# Altium PCB Definitive_Robo_Hand_main.PcbDoc
Units mm, origin at the board's own origin, x right, y up, seen from the top; angles counter-clockwise.
Board outline 99.06 x 96.6 mm, 2 copper layers (Top Layer, Bottom Layer); 21 components, 25 nets, 97 pads, 0 vias.
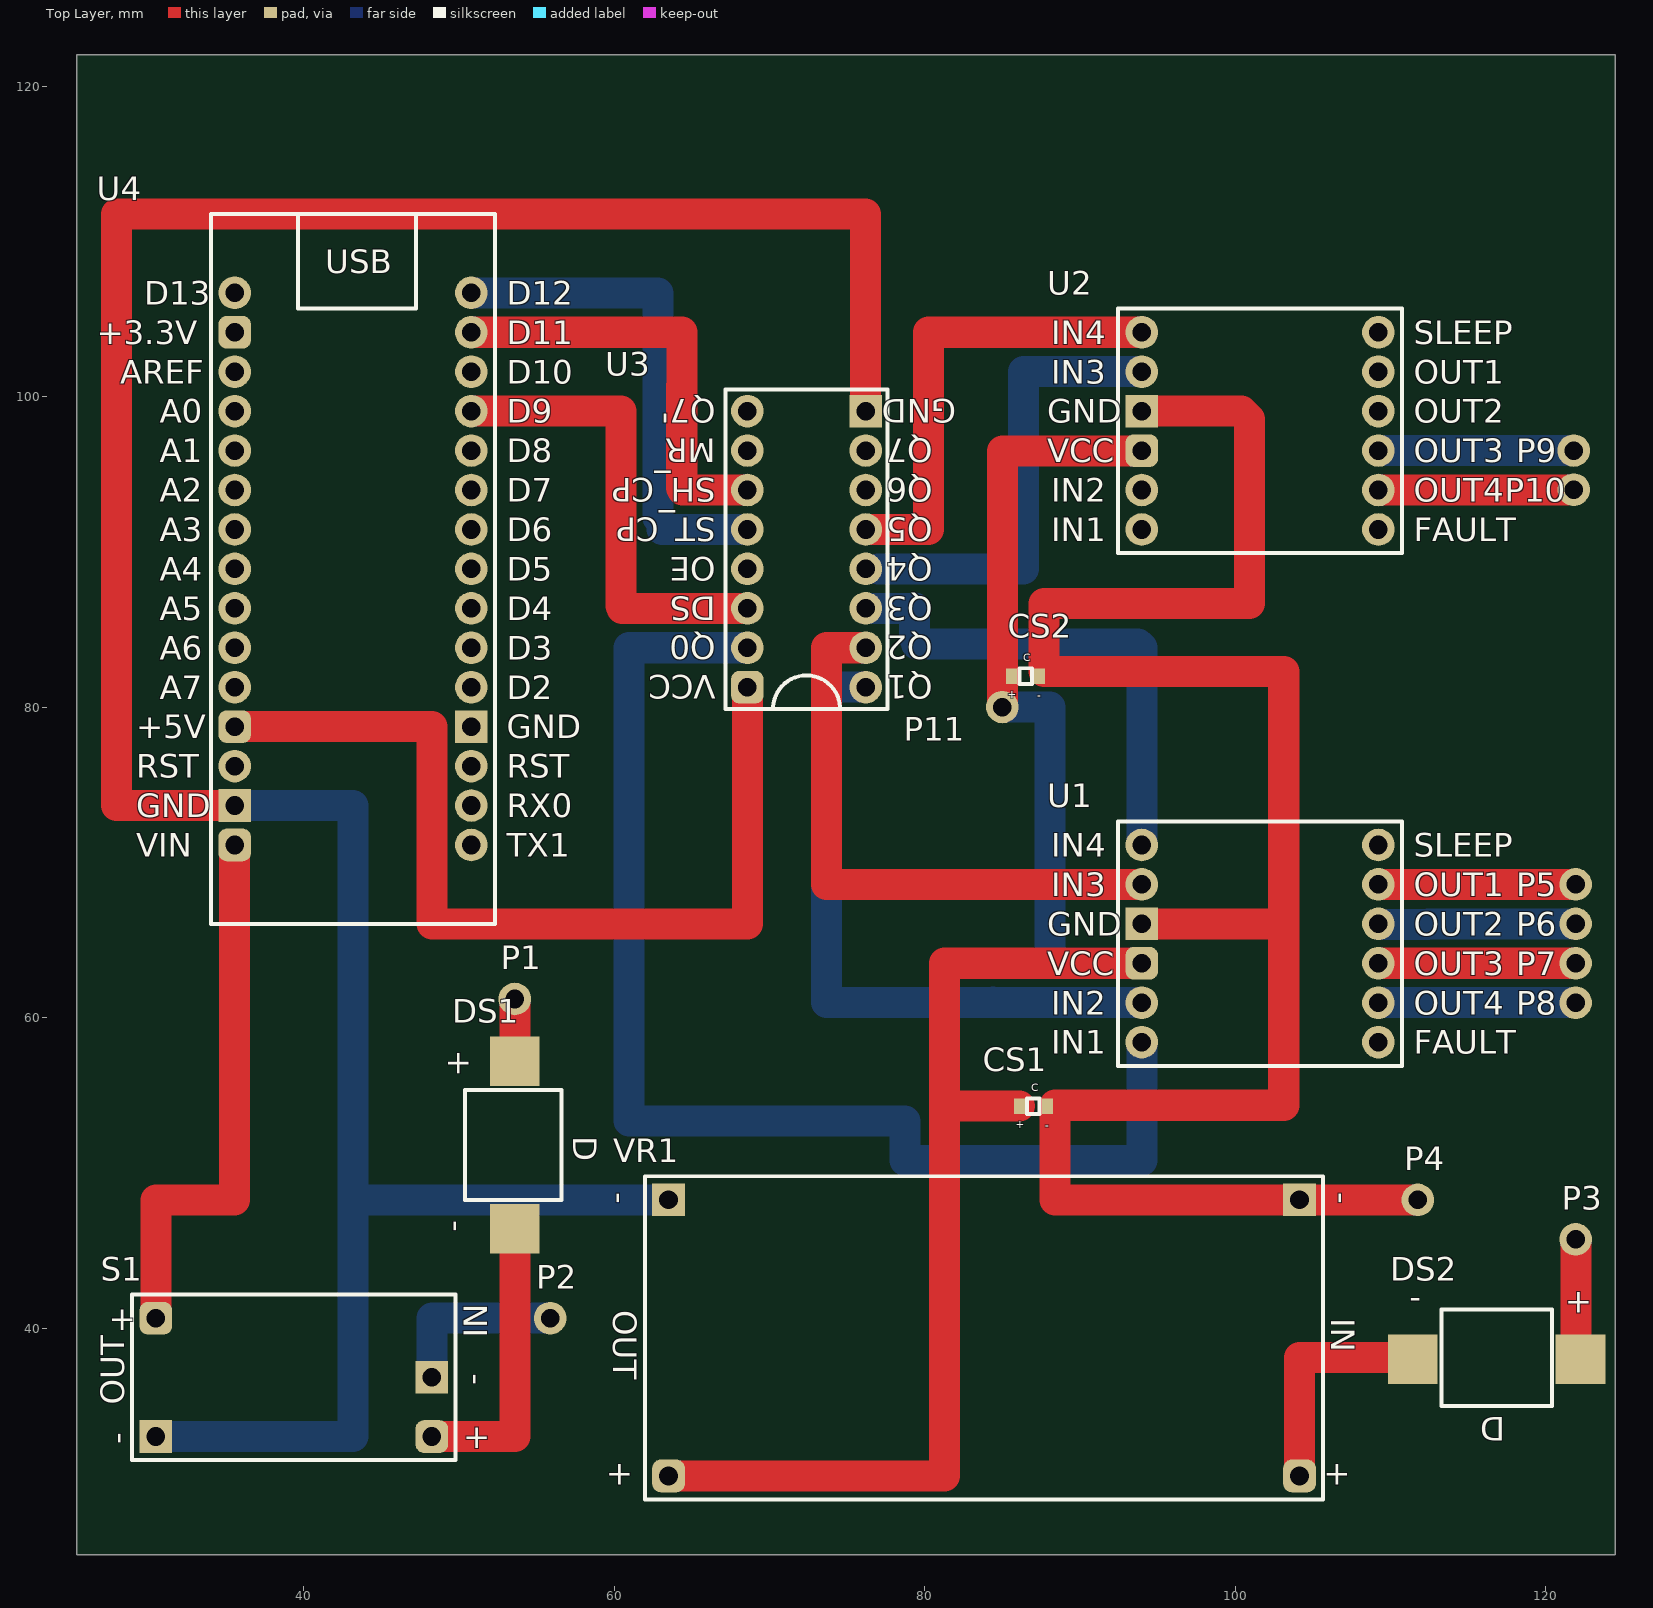
[diagram p0: Top Layer view]
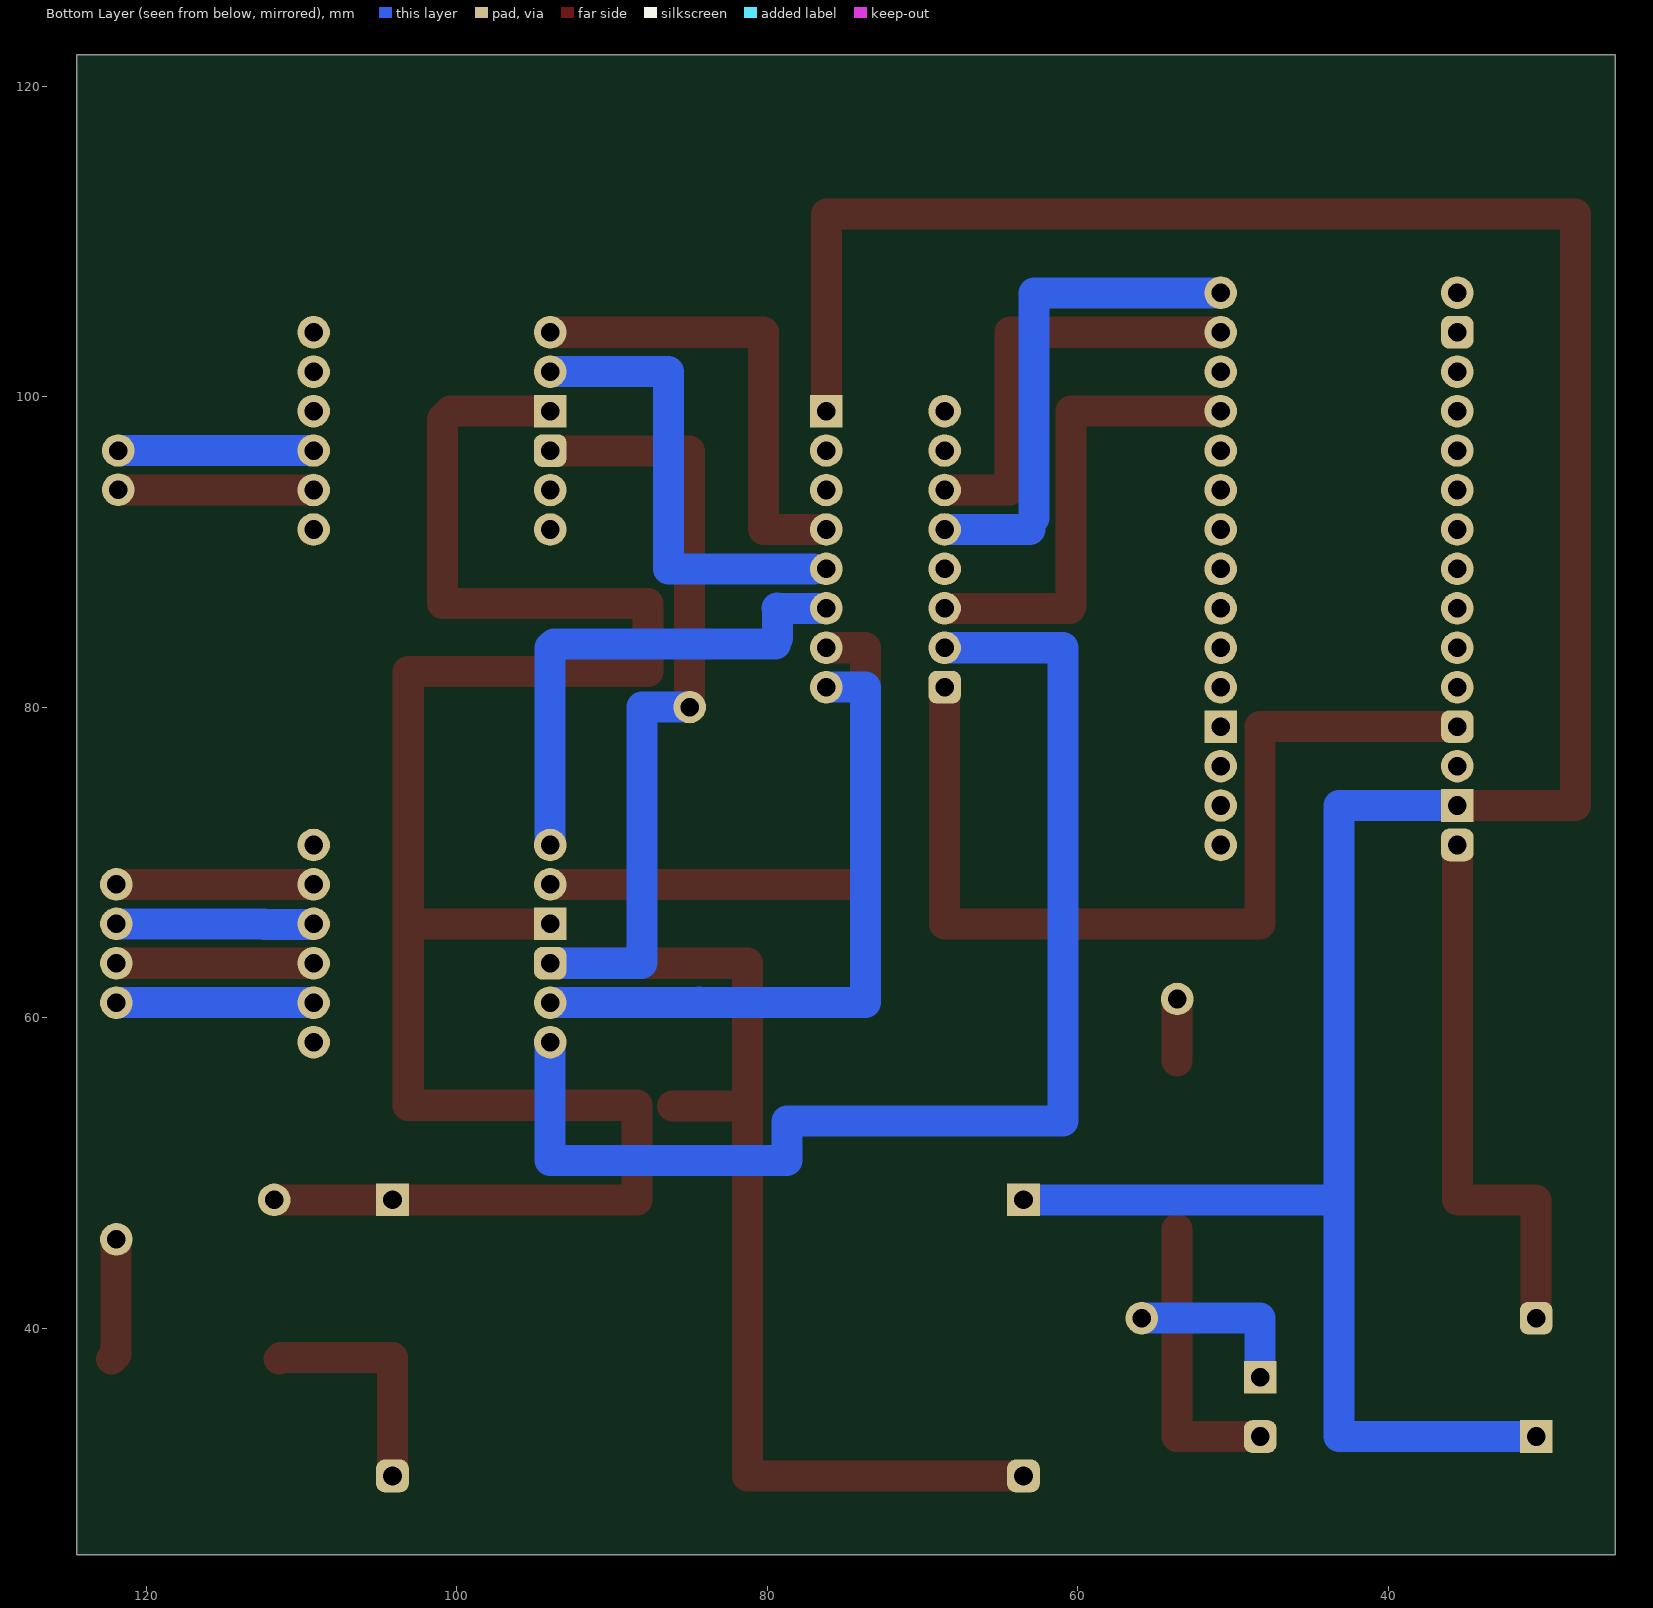
[diagram p1: Bottom Layer view, seen from below]

## Layer stack, top to bottom
Top Solder: solder mask 0.0102, Solder Resist, Dk 3.5
Top Layer: signal copper 0.0356
Dielectric 1: dielectric 0.32, FR-4, Dk 4.8
Bottom Layer: signal copper 0.0356
Bottom Solder: solder mask 0.0102, Solder Resist, Dk 3.5

## Board outline
25.4,25.4 124.46,25.4 124.46,122 25.4,122

## Design rules (kind name [scope] priority, off if disabled: settings)
AssemblyTestPointUsage [All] p1: isadvanced=TRUE
AssemblyTestpoint [All] p1: isadvanced=TRUE testpointundercomponent=TRUE minsize=1.016 maxsize=2.54 preferedsize=1.524 minholesize=0 maxholesize=1.016 preferedholesize=0.813 testpointgrid=0.025 usegrid=TRUE gridtolerance=0 allowsidetop=TRUE allowsidebottom=TRUE
Clearance Clearance_1 [OnMid vs OnMid] p1: gap=0.1 ignorepadtopadclearanceinfootprint=FALSE sourcerule=36 cellrowname=All cellrowtype=0 cellcolname=All cellcoltype=0 innerlayers=TRUE
Clearance Clearance_2 [(ExistsOnLayer('Top Layer') Or ExistsOnLayer('Bottom Layer')) vs (ExistsOnLayer('Top Layer') Or ExistsOnLayer('Bottom Layer'))] p2: gap=0.1 ignorepadtopadclearanceinfootprint=FALSE sourcerule=36 cellrowname=All cellrowtype=0 cellcolname=All cellcoltype=0 outerlayers=TRUE
Clearance [All] p3: gap=0.254 ignorepadtopadclearanceinfootprint=FALSE ismatrix=TRUE
ComponentClearance [All] p1: isadvanced=TRUE gap=0.254 collisioncheckmode=3 verticalgap=0.254 showdistances=FALSE
DiffPairsRouting [All] p1: maxlimit=0.2 minlimit=0.2 mostfreqgap=0.2 toplayer_minwidth=0.381 toplayer_maxwidth=0.381 toplayer_prefwidth=0.381 bottomlayer_minwidth=0.381 bottomlayer_maxwidth=0.381 bottomlayer_prefwidth=0.381 maxuncoupledlength=12.7
FabricationTestPointUsage [All] p1: isadvanced=TRUE valid=0 allowmultiple=FALSE
FabricationTestpoint [All] p1: isadvanced=TRUE side=3 testpointundercomponent=TRUE minsize=1.016 maxsize=2.54 preferedsize=1.524 minholesize=0 maxholesize=1.016 preferedholesize=0.813 testpointgrid=0.025 allowsidetop=TRUE allowsidebottom=TRUE usegrid=TRUE gridtolerance=0
FanoutControl Fanout_BGA [IsBGA] p1: isadvanced=TRUE bgadir=Out bgaviamode=Centered fanoutstyle=Auto fanoutdirection=Alternating viagrid=0.025 // Fanout_BGA (Default Rule)
FanoutControl Fanout_LCC [IsLCC] p2: isadvanced=TRUE bgadir=Out bgaviamode=Centered fanoutstyle=Auto fanoutdirection=Alternating viagrid=0.025 // Fanout_LCC (Default Rule)
FanoutControl Fanout_SOIC [IsSOIC] p3: isadvanced=TRUE bgadir=Out bgaviamode=Centered fanoutstyle=Auto fanoutdirection=Alternating viagrid=0.025 // Fanout_SOIC (Default Rule)
FanoutControl Fanout_Small [(CompPinCount < 5)] p4: isadvanced=TRUE bgadir=Out bgaviamode=Centered fanoutstyle=Auto fanoutdirection=OutThenIn viagrid=0.025 // Fanout_Small (Default Rule)
FanoutControl Fanout_Default [All] p5: isadvanced=TRUE bgadir=Out bgaviamode=Centered fanoutstyle=Auto fanoutdirection=Alternating viagrid=0.025 // Fanout_Default (Default Rule)
Height [All] p1: isadvanced=TRUE minheight=0 maxheight=25.4 prefheight=12.7
HoleSize [All] p1: isadvanced=TRUE absolutevalues=TRUE maxlimit=2.54 minlimit=0.025 maxpercent=80.000 minpercent=20.000
HoleToHoleClearance [All] p1: isadvanced=TRUE gap=0.254 allowstackedmicrovias=TRUE
LayerPairs [All] p1: isadvanced=TRUE enforce=TRUE
MinimumSolderMaskSliver [All] p1: isadvanced=TRUE minsoldermaskwidth=0.254
NetAntennae [All] p1: isadvanced=TRUE netantennaetolerance=0
PasteMaskExpansion [All] p1: isadvanced=TRUE expansion=0
PlaneClearance [All] p1: isadvanced=TRUE clearance=0.508
PlaneConnect [All] p1: isadvanced=TRUE planeconnectstyle=Relief reliefexpansion=0.508 reliefentries=4 reliefconductorwidth=0.254 reliefairgap=0.254
PolygonConnect [All] p1: connectstyle=Relief reliefconductorwidth=0.254 reliefentries=4 polygonreliefangle="90 Angle" airgapwidth=0.254
RoutingCorners [All] p1: isadvanced=TRUE cornerstyle=45-Degree minsetback=2.54 maxsetback=2.54
RoutingPriority [All] p1: isadvanced=TRUE routingpriority=0
RoutingVias [All] p1: holewidth=0.711 width=1.27 viastyle="Through Hole" minholewidth=0.711 minwidth=1.27 maxholewidth=0.711 maxwidth=1.27
ShortCircuit [All] p1: isadvanced=TRUE allowed=FALSE
SilkToSilkClearance [All] p1: isadvanced=TRUE silktosilkclearance=0.254
SilkToSolderMaskClearance [IsPad] p1: isadvanced=TRUE minsilkscreentomaskgap=0.254 clearancetoexposedcopper=TRUE
SolderMaskExpansion [All] p1: isadvanced=TRUE expansion=0.102 istentingtop=FALSE
UnRoutedNet [All] p1: isadvanced=TRUE
UnpouredPolygon [All] p1: isadvanced=TRUE
Width [All] p1: maxlimit=2 minlimit=2 preferedwidth=2 minimp=50.000000 maximp=50.000000 favimp=50.000000
3 further rules are at their usual default settings.

## Components (designator, comment, footprint, x,y, rotation, side; value= is the part's Value field where it differs from the comment)
CS1 "CapacitorSMD" CapacitorSMD 87,54.3 r0 top
CS2 "CapacitorSMD" CapacitorSMD 86.5,82 r0 top
DS1 "DiodeSS32SMD" DiodeSS32SMD 53.5,51.8 r270 top
DS2 "DiodeSS32SMD" DiodeSS32SMD 116.84,38.1 r180 top
P1 "Pin" P#1 53.6,61.2 r0 top
P2 "Pin" P#1 55.88,40.64 r0 top
P3 "Pin" P#1 121.92,45.72 r0 top
P4 "Pin" P#1 111.76,48.26 r0 top
P5 "Pin" P#1 121.92,68.58 r0 top
P6 "Pin" P#1 121.92,66.04 r0 top
P7 "Pin" P#1 121.92,63.5 r0 top
P8 "Pin" P#1 121.92,60.96 r0 top
P9 "Pin" P#2 121.92,96.52 r0 top
P10 "Pin" P#1 121.8,94 r0 top
P11 "Pin" P#1 85,80 r0 top
S1 "SX1308" "DC-DC Step-Up Footprint" 27.94,30.48 r0 top
U1 "DRV8833" PCB_DRV8833 91.44,55.88 r0 top
U2 "DRV8833" PCB_DRV8833 91.44,88.9 r0 top
U3 "74HC595" PCB_74HC595_Footprint 78.74,101.6 r180 top
U4 "DRV8833" PCB_ATMega328p 33.02,68.58 r0 top
VR1 "LM2596" "DC-DC Step-Down Footprint" 106.68,50.8 r180 top

## Footprints (in the part's own frame and the unit in brackets; to place one, negate y for a bottom-side part, rotate by r counter-clockwise, add the part's x,y. Pads: shape width x height; smd on the part's side, far side on the other; paste and mask are expansions set on the pad)
CapacitorSMD [mm]
  rect 0.7x1 smd: 0(-0.9,0) 1(0.9,0)
  silkscreen extent -0.4,-0.5 0.4,0.5
"DC-DC Step-Down Footprint" [mm]
  rrect50% 2.1x2.1 hole 1.2: 0(2.54,20.32) 2(43.18,20.32)
  rect 2.1x2.1 hole 1.2: 1(2.54,2.54) 3(43.18,2.54)
  silkscreen extent 1.02,1.02 44.7,21.84
"DC-DC Step-Up Footprint" [mm]
  rrect50% 2.1x2.1 hole 1.2: 0(2.54,10.16) 3(20.32,2.54)
  rect 2.1x2.1 hole 1.2: 1(2.54,2.54) 2(20.32,6.35)
  silkscreen extent 1.02,1.02 21.84,11.68
DiodeSS32SMD [mm]
  rect 3.2x3.2 smd: 0(-5.4,0.1) 1(5.4,0.1)
  silkscreen extent -3.55,-3.1 3.55,3.1
P#1 [mm]
  round 2.1 hole 1.2: 0(0,0)
P#2 [mm]
  round 2.1 hole 1.2: 0(-0.12,0)
PCB_74HC595_Footprint [mm]
  rect 2.1x2.1 hole 1.2: 0(2.54,2.54)
  round 2.1 hole 1.2: 1(2.54,5.08) 2(2.54,7.62) 3(2.54,10.16) 4(2.54,12.7) 5(2.54,15.24) 6(2.54,17.78) 7(2.54,20.32) 9(10.16,17.78) 10(10.16,15.24) 11(10.16,12.7) 12(10.16,10.16) 13(10.16,7.62) 14(10.16,5.08) 15(10.16,2.54)
  rrect50% 2.1x2.1 hole 1.2: 8(10.16,20.32)
  silkscreen extent 1.14,1.14 11.56,21.72
PCB_ATMega328p [mm]
  rrect50% 2.1x2.1 hole 1.2: 0(2.54,2.54) 3(2.54,10.16) 13(2.54,35.56)
  rect 2.1x2.1 hole 1.2: 1(2.54,5.08) 26(17.78,10.16)
  round 2.1 hole 1.2: 2(2.54,7.62) 4(2.54,12.7) 5(2.54,15.24) 6(2.54,17.78) 7(2.54,20.32) 8(2.54,22.86) 9(2.54,25.4) 10(2.54,27.94) 11(2.54,30.48) 12(2.54,33.02) 14(2.54,38.1) 15(17.78,38.1) 16(17.78,35.56) 17(17.78,33.02) 18(17.78,30.48) 19(17.78,27.94) 20(17.78,25.4) 21(17.78,22.86) 22(17.78,20.32) 23(17.78,17.78) 24(17.78,15.24) 25(17.78,12.7) 27(17.78,7.62) 28(17.78,5.08) 29(17.78,2.54)
  silkscreen extent 1.02,-2.54 19.3,43.18
PCB_DRV8833 [mm]
  round 2.1 hole 1.2: 0(2.54,2.54) 1(2.54,5.08) 4(2.54,12.7) 5(2.54,15.24) 6(17.78,15.24) 7(17.78,12.7) 8(17.78,10.16) 9(17.78,7.62) 10(17.78,5.08) 11(17.78,2.54)
  rrect50% 2.1x2.1 hole 1.2: 2(2.54,7.62)
  rect 2.1x2.1 hole 1.2: 3(2.54,10.16)
  silkscreen extent 1.02,1.02 19.3,16.76

## Part data
S1: "Модуль mini DC-DC Step-Up Converter 2.5...10V to 5V / 8V / 9V / 12V - это миниатюрный повышающий преобразователь постоянного тока на микросхеме импульсного преобразователя SX1308.  /  /  Выходное напряжение на преобразователе имеет четыре фиксированных настройки - 5В, 8В, 9В или 12В, одно из этих напряжений выбирается запайкой соответствующей комбинации перемычек A и B (по табличке на обратной стороне платы). /  /  Максимальный выходной ток зависит от установленного выходного напряжения, при 5В он равен 1А, при 8В - 0.5А, 9В - 0,45А, 12В - 0.3А. Частота преобразования - 1.2 МГц. /  /  На плате (со стороны Vout) светодиод - индикатор питания. По умолчанию он выключен. Для включения этого светодиода также нужно запаять соседнюю перемычку."
U1 U2: library part "Motor Driver", "Драйвер крокового/колекторних двигунів DRV8833"
U3: library part SCS-16, "SN74HC595N - вихідний зсувний регістр 74HC595"
U4: library part "Arduino Nano", "DCCduino Nano CH340 - аналог Arduino Nano v3.0 TYPE C"
VR1: library part "DC-DC Step-Down", "DC-DC конвертер знижуючий 4.5...40В на 1.5...35В на LM2596"

## Nets (pads, with @x,y where several pads share a name; then routed paths per layer and width w, separated by ;. In a path a pad name is that pad's centre, name@x,y a point inside that pad or via, vN(x,y) a via of type N, cw(c..) or ccw(c..) an arc to the next point about the centre after c; other vN are vias at no path point)
NetCS1_0: CS1.0 CS2.0 P11.0 U1.2 U2.2 VR1.2 | length 119.5
  Top Layer w2: VR1.2 81.28,30.48 81.28,54.5 ; P11.0 85,96.5 93.96,96.5 U2.2 ; CS1.0 81.28,54.3 81.28,54.5 ; U1.2 81.28,63.5 81.28,54.5
  Bottom Layer w2: P11.0 85.019,80.019 88.069,80.019 88.069,63.531 88.1,63.5 U1.2
NetCS1_1: CS1.1 CS2.1 P4.0 U1.3 U2.3 VR1.1 | length 133.3
  Top Layer w2: U1.3 103.124,66.04 ; U2.3 100.396,99.06 100.904,98.552 100.904,86.68 87.696,86.68 87.696,82.296 103.124,82.296 103.124,66.04 ; P4.0 VR1.1 88.392,48.26 88.392,54.356 103.124,54.356 103.124,66.04
NetDS1_0: DS1.0 P1.0 | length 4
  Top Layer w2: DS1.0 P1.0
NetDS1_1: DS1.1 S1.3 | length 18.7
  Top Layer w2: S1.3 53.6,33.02 DS1.1
NetDS2_0: DS2.0 P3.0 | length 7.9
  Top Layer w2: P3.0 121.939,45.701 121.939,38.301 DS2.0
NetDS2_1: DS2.1 VR1.0 | length 15
  Top Layer w2: VR1.0 104.14,38.1 111.34,38.1 DS2.1
NetP2_0: P2.0 S1.2 | length 11.4
  Bottom Layer w2: S1.2 48.26,40.64 P2.0
NetP5_0: P5.0 U1.7 | length 12.7
  Top Layer w2: U1.7 P5.0
NetP6_0: P6.0 U1.8 | length 12.7
  Bottom Layer w2: U1.8 109.26,66 112.368,66 112.408,66.04 118.732,66.04 P6.0
NetP7_0: P7.0 U1.9 | length 12.7
  Top Layer w2: U1.9 P7.0
NetP8_0: P8.0 U1.10 | length 12.7
  Bottom Layer w2: U1.10 P8.0
NetP9_0: P9.0 U2.9 | length 12.4
  Bottom Layer w2: U2.9 P9.0@121.58,96.52
NetP10_0: P10.0 U2.10 | length 12.2
  Top Layer w2: U2.10 P10.0@121.38,93.98
NetS1_0: S1.0 U4.0 | length 35.6
  Top Layer w2: S1.0 30.48,48.26 35.56,48.26 U4.0
NetS1_1: S1.1 U3.0 U4.1 VR1.3 | length 187.5
  Top Layer w2: U4.1@35,73.66 27.94,73.66 27.94,111.76 76.2,111.76 U3.0
  Bottom Layer w2: S1.1 43.18,33.02 43.18,48.5 ; U4.1 43.18,73.66 43.18,48.5 ; VR1.3 43.42,48.26 43.18,48.5
NetU1_0: U1.0 U3.9 | length 81.3
  Bottom Layer w2: U3.9 60.96,83.82 60.96,53.34 78.74,53.34 78.74,50.8 93.98,50.8 U1.0
NetU1_1: U1.1 U3.7 | length 43.3
  Bottom Layer w2: U3.7 73.66,81.28 73.66,60.96 U1.1@94,60.96 ; 84.36,60.96 84.4,61
NetU1_4: U1.4 U3.6 | length 38.1
  Top Layer w2: U3.6 73.66,83.82 73.66,68.58 U1.4
NetU1_5: U1.5 U3.5 | length 32.4
  Bottom Layer w2: U3.5 79.351,86.36 ; 79.351,84.431 79.351,86.36 ; 79.388,86.36 79.369,86.378 79.351,86.36 ; 79.48,84.05 93.75,84.05 93.98,83.82 U1.5
NetU2_4: U2.4 U3.4 | length 29.7
  Bottom Layer w2: U3.4@77,88.9 86.36,88.9 86.36,101.6 U2.4
NetU2_5: U2.5 U3.3 | length 30
  Top Layer w2: U3.3@76.25,91.44 U3.3 80,91.44 ; 80.25,91.44 80.25,101.353 ; 80.25,101.403 80.25,104.14 ; 80.5,104.14 U2.5
NetU3_8: U3.8 U4.3 | length 61
  Top Layer w2: U4.3 48.26,78.74 48.26,66.04 68.58,66.04 U3.8
NetU3_10: U3.10 U4.18 | length 30.3
  Top Layer w2: U4.18 60.44,99.06 60.44,86.5 ; 60.5,86.36 U3.10
NetU3_12: U3.12 U4.15 | length 32
  Bottom Layer w2: U4.15 62.82,106.68 62.82,92.18 ; 63.08,91.44 U3.12
NetU3_13: U3.13 U4.16 | length 27.7
  Top Layer w2: U4.16 64.36,104.14 64.36,100.797 ; 64.35,94.1 64.35,100.717 ; 64.4,93.98 U3.13
pads on no net: U1.6 U1.11 U2.0 U2.1 U2.6 U2.7 U2.8 U2.11 U3.1 U3.2 U3.11 U3.14 U3.15 U4.2 U4.4 U4.5 U4.6 U4.7 U4.8 U4.9 U4.10 U4.11 U4.12 U4.13 U4.14 U4.17 U4.19 U4.20 U4.21 U4.22 U4.23 U4.24 U4.25 U4.26 U4.27 U4.28 U4.29

## Text inside footprints (layer, text, board x,y; h text height)
CS1: Top Overlay "C" at 86.854,55.254 h0.5; Top Overlay "-" at 87.754,52.804 h0.5; Top Overlay "+" at 85.854,52.871 h0.5
CS2: Top Overlay "+" at 85.354,80.571 h0.5; Top Overlay "-" at 87.254,80.504 h0.5; Top Overlay "C" at 86.354,82.954 h0.5
DS1: Top Overlay "D" at 57.354,52.346 h1.52 r270; Top Overlay "+" at 49.3,57.946 h1.52 r270; Top Overlay "-" at 49.192,46.946 h1.52 r270
DS2: Top Overlay "-" at 111.986,42.408 h1.52 r180; Top Overlay "+" at 122.986,42.3 h1.52 r180; Top Overlay "D" at 117.386,34.246 h1.52 r180
S1: Top Overlay "OUT" at 28.448,35.052 h1.52 r90; Top Overlay "+" at 27.432,39.878 h1.52; Top Overlay "-" at 28.702,32.512 h1.52 r90; Top Overlay "IN" at 51.816,39.37 h1.52 r90; Top Overlay "-" at 51.562,36.322 h1.52 r90; Top Overlay "+" at 50.292,32.258 h1.52
U1: Top Overlay "IN1" at 88.138,57.658 h1.52; Top Overlay "IN2" at 88.138,60.198 h1.52; Top Overlay "VCC" at 87.884,62.738 h1.52; Top Overlay "GND" at 87.884,65.278 h1.52; Top Overlay "IN3" at 88.138,67.818 h1.52; Top Overlay "IN4" at 88.138,70.358 h1.52; Top Overlay "SLEEP" at 111.506,70.358 h1.52; Top Overlay "OUT1" at 111.506,67.818 h1.52; Top Overlay "OUT2" at 111.506,65.278 h1.52; Top Overlay "OUT3" at 111.506,62.738 h1.52; Top Overlay "OUT4" at 111.506,60.198 h1.52; Top Overlay "FAULT" at 111.506,57.658 h1.52
U2: Top Overlay "FAULT" at 111.506,90.678 h1.52; Top Overlay "OUT4" at 111.506,93.218 h1.52; Top Overlay "OUT3" at 111.506,95.758 h1.52; Top Overlay "OUT2" at 111.506,98.298 h1.52; Top Overlay "OUT1" at 111.506,100.838 h1.52; Top Overlay "SLEEP" at 111.506,103.378 h1.52; Top Overlay "IN4" at 88.138,103.378 h1.52; Top Overlay "IN3" at 88.138,100.838 h1.52; Top Overlay "GND" at 87.884,98.298 h1.52; Top Overlay "VCC" at 87.884,95.758 h1.52; Top Overlay "IN2" at 88.138,93.218 h1.52; Top Overlay "IN1" at 88.138,90.678 h1.52
U3: Top Overlay "Q7'" at 66.548,99.822 h1.52 r180; Top Overlay "MR" at 66.548,97.282 h1.52 r180; Top Overlay "SH_CP" at 66.548,94.742 h1.52 r180; Top Overlay "ST_CP" at 66.548,92.202 h1.52 r180; Top Overlay "OE" at 66.548,89.662 h1.52 r180; Top Overlay "DS" at 66.548,87.122 h1.52 r180; Top Overlay "Q0" at 66.548,84.582 h1.52 r180; Top Overlay "VCC" at 66.548,82.042 h1.52 r180; Top Overlay "GND" at 82.042,99.822 h1.52 r180; Top Overlay "Q7" at 80.518,97.282 h1.52 r180; Top Overlay "Q6" at 80.518,94.742 h1.52 r180; Top Overlay "Q5" at 80.518,92.202 h1.52 r180; Top Overlay "Q4" at 80.518,89.662 h1.52 r180; Top Overlay "Q3" at 80.518,87.122 h1.52 r180; Top Overlay "Q2" at 80.518,84.582 h1.52 r180; Top Overlay "Q1" at 80.518,82.042 h1.52 r180
U4: Top Overlay "D13" at 29.718,105.918 h1.52; Top Overlay "+3.3V" at 26.67,103.378 h1.52; Top Overlay "AREF" at 28.194,100.838 h1.52; Top Overlay "A0" at 30.734,98.298 h1.52; Top Overlay "A1" at 30.734,95.758 h1.52; Top Overlay "A2" at 30.734,93.218 h1.52; Top Overlay "A3" at 30.734,90.678 h1.52; Top Overlay "A4" at 30.734,88.138 h1.52; Top Overlay "A5" at 30.734,85.598 h1.52; Top Overlay "A6" at 30.734,83.058 h1.52; Top Overlay "A7" at 30.734,80.518 h1.52; Top Overlay "+5V" at 29.21,77.978 h1.52; Top Overlay "RST" at 29.21,75.438 h1.52; Top Overlay "GND" at 29.21,72.898 h1.52; Top Overlay "VIN" at 29.21,70.358 h1.52; Top Overlay "D12" at 53.086,105.918 h1.52; Top Overlay "D11" at 53.086,103.378 h1.52; Top Overlay "D10" at 53.086,100.838 h1.52; Top Overlay "D9" at 53.086,98.298 h1.52; Top Overlay "D8" at 53.086,95.758 h1.52; Top Overlay "D7" at 53.086,93.218 h1.52; Top Overlay "D6" at 53.086,90.678 h1.52; Top Overlay "D5" at 53.086,88.138 h1.52; Top Overlay "D4" at 53.086,85.598 h1.52; Top Overlay "D3" at 53.086,83.058 h1.52; Top Overlay "D2" at 53.086,80.518 h1.52; Top Overlay "GND" at 53.086,77.978 h1.52; Top Overlay "RST" at 53.086,75.438 h1.52; Top Overlay "RX0" at 53.086,72.898 h1.52; Top Overlay "TX1" at 53.086,70.358 h1.52; Top Overlay "USB" at 41.402,107.95 h1.52
VR1: Top Overlay "OUT" at 59.944,41.148 h1.52 r270; Top Overlay "IN" at 106.172,40.64 h1.52 r270; Top Overlay "+" at 61.214,31.242 h1.52 r180; Top Overlay "-" at 59.69,48.768 h1.52 r270; Top Overlay "-" at 106.172,48.768 h1.52 r270; Top Overlay "+" at 107.442,31.242 h1.52 r180